# Altium PCB pcb-rev1-env.PcbDoc (part 2 of 2)
Units mm, origin at the board's own origin, x right, y up, seen from the top; angles counter-clockwise.
Board outline 100 x 50 mm, 2 copper layers (Top Layer, Bottom Layer); 97 components, 95 nets, 368 pads, 249 vias.
Unrouted connection lines stored in the file: 77.
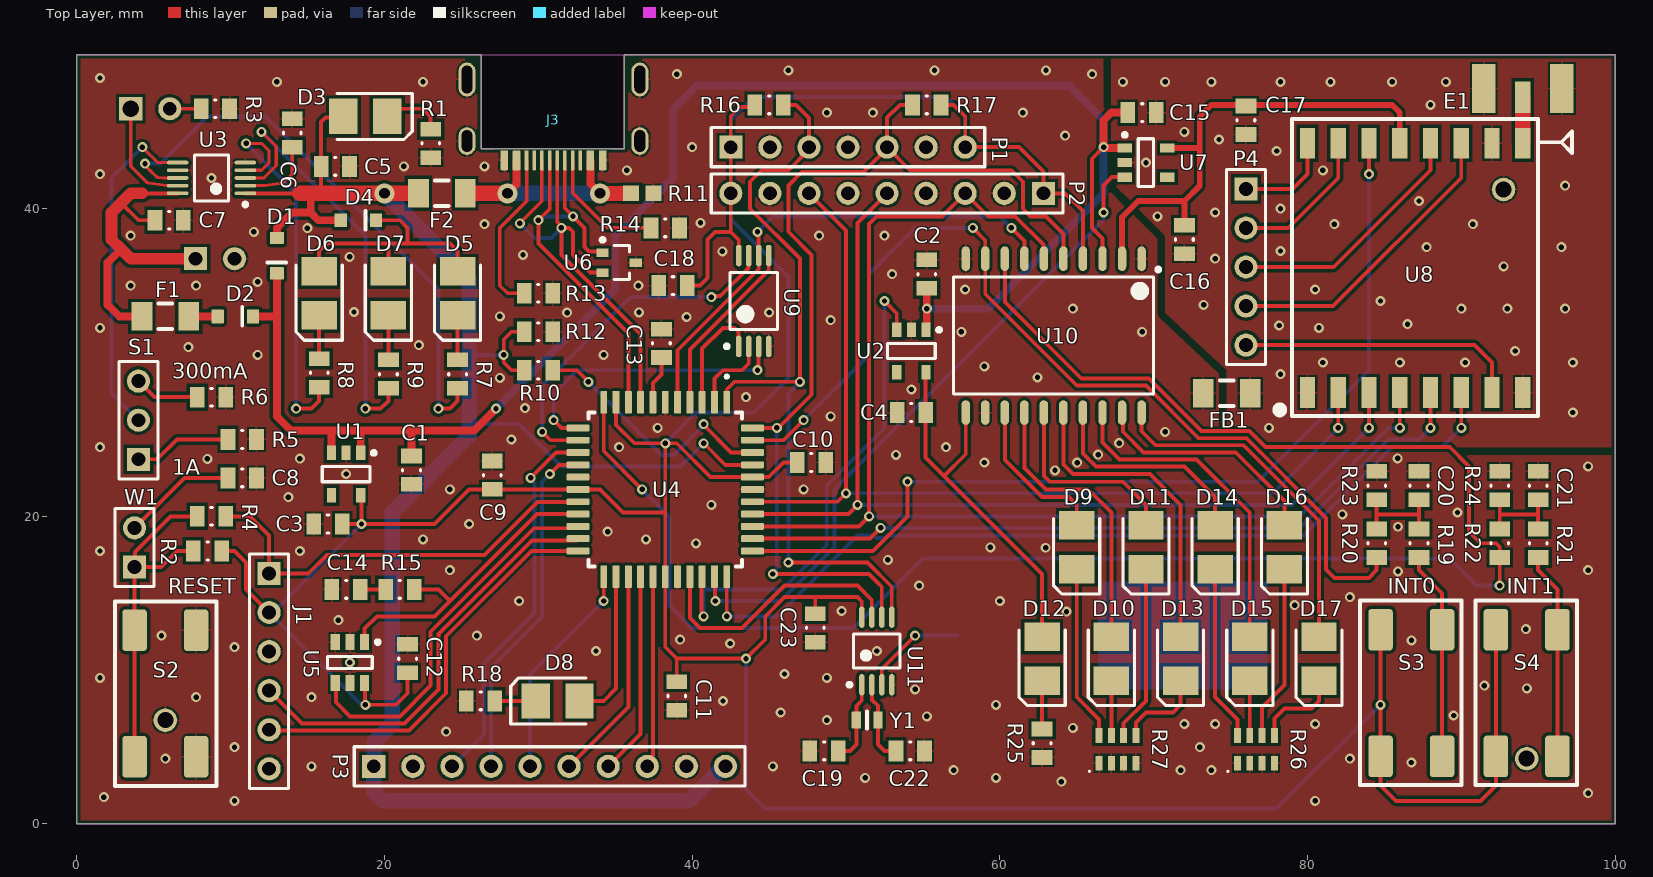
[diagram p0: Top Layer view]

## Via types
v1: diameter 0.65, hole 0.35, Top Layer to Bottom Layer, 246 vias
v2: diameter 1.3, hole 0.7, Top Layer to Bottom Layer, 3 vias

## Nets (pads, with @x,y where several pads share a name; then routed paths per layer and width w, separated by ;. In a path a pad name is that pad's centre, name@x,y a point inside that pad or via, vN(x,y) a via of type N, cw(c..) or ccw(c..) an arc to the next point about the centre after c; other vN are vias at no path point) (continued)
MEMDO: U4.4 U9.5 | length 11.7
  Top Layer w0.254: U4.4 39.85,30.85 44.975,35.975 U9.5
MEMHOLD: U4.13 U9.7 | length 22.9
  Top Layer w0.254: v1(30.25,25.5) 30.8,24.95 U4.13 ; v1(41.25,34.25) 41.326,34.326 41.826,34.326 43.658,36.158 43.658,36.933 U9.7
  Bottom Layer w0.254: v1(30.25,25.5) 30.25,28.5 36,34.25 v1(41.25,34.25)
MEMWP: U4.12 U9.3 | length 18.9
  Top Layer w0.254: v1(31,26.25) 31.5,25.75 U4.12 ; v1@44.301,29.551 44.301,31.026 U9.3
  Bottom Layer w0.254: v1(31,26.25) 31,28 32.5,29.5 v1(44.25,29.5)
MISO: P2.7 U4.38 U8.2 | length 62.9
  Top Layer w0.254: U4.38 49.45,20.95 v1(50,21.5) 50,38.59 P2.7 ; v1(82,25.75) U8.2
  Bottom Layer w0.254: v1(50,21.5) 77.75,21.5 v1(82,25.75)
MOSI: P2.5 U4.37 U8.3 | length 65.7
  Top Layer w0.254: U4.37 50.15,20.15 v1(50.75,20.75) 50.75,39.08 P2.5 ; v1(84,25.75) U8.3
  Bottom Layer w0.254: v1(50.75,20.75) 79,20.75 v1(84,25.75)
NetBT1_POS: BT1.POS U11.3 | length 6.9
  Top Layer w0.254: U11.3 52.325,10.075 v1(54.5,12.25)
  Bottom Layer w0.254: v1(54.5,12.25) BT1.POS
NetC6_2: C6.2 U3.2 | length 5
  Top Layer w0.203: U3.2 12.231,41.5 13.434,41.684 14,42.25 C6.2
NetC8_2: C8.2 W1.2 | length 7.1
  Top Layer w0.254: W1.2 7,22.5 C8.2@9.478,22.5
NetC14_1: C14.1 R15.1 | length 1.7
  Top Layer w0.254: C14.1 R15.1
NetC20_1: C20.1 R19.1 R20.1 R23.1 | length 6.6
  Top Layer w0.254: R20.1 84.5,20.125 ; R23.1 84.5,20.125 ; R19.1 87.25,20.125 ; C20.1 87.25,20.125 ; 84.5,20.125 87.25,20.125
NetC21_1: C21.1 R21.1 R22.2 R24.1 | length 6.3
  Top Layer w0.254: R22.2 92.5,20.125 ; R24.1 92.5,20.125 ; R21.1 95,20.125 ; C21.1 95,20.125 ; 92.5,20.125 95,20.125
NetD2_2: D2.2 F1.2 | length 1.9
  Top Layer w0.508: F1.2 D2.2
NetD3_2: D3.2 R1.1 | length 4.1
  Top Layer w0.254: D3.2 20.675,46.5 22.5,46.5 23,46 R1.1
NetD5_2: D5.2 R7.2 | length 2.9
  Top Layer w0.254: R7.2 D5.2
NetD6_2: D6.2 R8.2 | length 2.8
  Top Layer w0.254: R8.2 D6.2
NetD7_2: D7.2 R9.2 | length 2.9
  Top Layer w0.254: R9.2 D7.2
NetD8_2: D8.2 R18.2 | length 2.6
  Top Layer w0.254: R18.2 D8.2
NetD9_2: D9.2 R27.8 | length 11.4
  Top Layer w0.254: D9.2 65,8.25 66.45,6.8 R27.8
NetD10_2: D10.2 R27.7 | length 3.6
  Top Layer w0.254: R27.7 D10.2
NetD11_2: D11.2 R27.6 | length 11.4
  Top Layer w0.254: R27.6 68.05,6.55 69.5,8 D11.2
NetD12_2: D12.2 R25.2 | length 3.2
  Top Layer w0.254: R25.2 D12.2
NetD13_2: D13.2 R27.5 | length 5.8
  Top Layer w0.254: R27.5 68.85,6.6 69.5,7.25 71.25,7.25 71.75,7.75 D13.2
NetD14_2: D14.2 R26.8 | length 11.4
  Top Layer w0.254: D14.2 74,8.25 75.45,6.8 R26.8
NetD15_2: D15.2 R26.7 | length 3.6
  Top Layer w0.254: R26.7 D15.2
NetD16_2: D16.2 R26.6 | length 11.4
  Top Layer w0.254: R26.6 77.05,7.583 78.5,9.033 D16.2
NetD17_2: D17.2 R26.5 | length 5.8
  Top Layer w0.254: R26.5 77.85,6.85 78.5,7.5 80.25,7.5 80.75,8 D17.2
NetE1_ANT: E1.ANT U8.9 | length 3
  Top Layer w1: U8.9 E1.ANT
NetP4_1: P4.1 U8.16 | length 6.4
  Top Layer w0.254: P4.1 79.04,41.29 80,42.25 U8.16
NetP4_2: P4.2 U8.15 | length 9.6
  Top Layer w0.254: P4.2 78.75,38.75 82,42 U8.15
NetP4_3: P4.3 U8.12 | length 16.4
  Top Layer w0.254: P4.3 81.71,36.21 88,42.5 U8.12
NetP4_4: P4.4 U8.11 | length 19.7
  Top Layer w0.254: P4.4 81.67,33.67 90,42 U8.11
NetP4_5: P4.5 U8.7 | length 18.4
  Top Layer w0.254: P4.5 90.87,31.13 92,30 U8.7
NetR2_1: R2.1 R4.2 S2.3-4 W1.1 | length 22.8
  Top Layer w0.254: S2.3-4@3.75,4.375 3.75,12.6 W1.1 ; R2.1@7.825,17.75 R2.1 6.5,17.75 5.46,16.71 W1.1 ; R4.2 6.079,20 3.771,17.692 3.771,16.731 W1.1
NetR3_2: R3.2 RT1.2 | length 2
  Top Layer w0.254: RT1.2 R3.2
NetR5_1: R5.1 S1.1 | length 6.4
  Top Layer w0.254: S1.1 5.21,23.71 6.5,25 R5.1
NetR6_1: R6.1 S1.3 | length 4.3
  Top Layer w0.254: S1.3 5.04,27.75 R6.1
NetR10_1: R10.1 U4.42 | length 17
  Top Layer w0.254: R10.1 32.5,29.5 v1(33.25,28.75) ; v1(40.75,26) 40.75,25.93 42.53,24.15 U4.42
  Bottom Layer w0.254: v1(33.25,28.75) 38,24 38.82,24 40.75,25.93 v1(40.75,26)
NetR19_2: R19.2 S3.3-4 | length 13.5
  Top Layer w0.254: R19.2 87.25,16.5 88.75,15 88.75,12.625 S3.3-4@88.75,4.4
NetR21_2: R21.2 S4.3-4 | length 13.4
  Top Layer w0.254: R21.2 95,16.5 96.25,15.25 96.25,12.625 S4.3-4@96.25,4.4
PG: R7.1 U3.8 | length 37.6
  Top Layer w0.203: v1(4.43,42.93) 4.43,42.809 4.803,42.436 5.139,42.099 5.188,42.051 5.255,42.042 5.56,42 U3.8
  Top Layer w0.254: v1(23.5,27) 24.25,27 24.75,27.5 R7.1
  Bottom Layer w0.254: v1(4.43,42.93) 5.43,42.93 8.5,46 12.25,46 23.5,34.75 v1(23.5,27)
PGC: J1.5 U4.22 | length 27.1
  Top Layer w0.254: J1.5 12.544,6.086 21.586,6.086 24,8.5 24,12.207 29.543,17.75 U4.22
PGD: J1.4 U4.21 | length 28
  Top Layer w0.254: J1.4 14.627,6.543 21.293,6.543 23.5,8.75 23.5,12.353 29.574,18.427 32.457,18.427 U4.21
PROG1: S1.2 U3.6 | length 22
  Top Layer w0.203: v1(4.25,44) 5.25,43 U3.6
  Bottom Layer w0.254: S1.2 2.25,28 2.25,42 v1(4.25,44)
RB2: P3.5 U4.23 | length 14.3
  Top Layer w0.254: v1(34.25,14.5) U4.23
  Bottom Layer w0.254: P3.5 29.46,9.71 v1(34.25,14.5)
RB14: P3.3 U4.14 | length 24.8
  Top Layer w0.254: v1(29.5,22.5) 31.15,24.15 U4.14
  Bottom Layer w0.254: P3.3 26.463,5.833 26.463,10.359 26.5,10.397 26.5,10.5 29.75,13.75 29.75,22.153 29.5,22.403 v1(29.5,22.5)
RB15: P3.4 U4.15 | length 22.7
  Top Layer w0.254: v1(30.75,22.75) 31.35,23.35 U4.15
  Bottom Layer w0.254: P3.4 26.92,10.17 30.25,13.5 30.25,22.25 v1(30.75,22.75)
RC0: P3.6 U4.25 | length 13.9
  Top Layer w0.254: P3.6 35.85,7.6 U4.25
RC1: P3.7 U4.26 | length 13.2
  Top Layer w0.254: P3.7 36.65,5.86 U4.26
RC2: P3.8 U4.27 | length 12.5
  Top Layer w0.254: P3.8 37.08,4.087 37.45,4.457 U4.27
RFCS: U4.35 U8.5 | length 49.4
  Top Layer w0.254: U4.35 51.55,18.55 v1(52.25,19.25) ; v1(88,25.75) U8.5
  Bottom Layer w0.254: v1(52.25,19.25) 79.5,19.25 85.25,25 87.25,25 v1(88,25.75)
RFEN: U4.32 U7.3 | length 43.2
  Top Layer w0.254: U4.32 41.475,16.055 41.475,14.525 v1(41.5,14.5) ; v1(66.75,39.75) 66.75,41.5 67.3,42.05 U7.3
  Bottom Layer w0.254: v1(41.5,14.5) 45.75,14.5 49.25,18 49.25,21.774 66.743,39.267 66.743,39.743 v1(66.75,39.75)
RFINT: U4.34 U8.14 | length 61
  Top Layer w0.254: U4.34 51.75,17.75 54,20 v1(54,22.25) ; v1(84,42.25) U8.14
  Bottom Layer w0.254: v1(54,22.25) 76.75,22.25 84,29.5 v1(84,42.25)
RFRST: U4.33 U8.6 | length 57.8
  Top Layer w0.254: v1(42.25,13.5) U4.33 ; v1(90,25.75) U8.6
  Bottom Layer w0.254: v1(42.25,13.5) 45.5,13.5 50.75,18.75 51.823,18.75 51.979,18.595 52.521,18.595 52.677,18.75 79.75,18.75 85.5,24.5 88.75,24.5 v1(90,25.75)
RTCC: D8.1 U4.24 | length 10
  Top Layer w0.254: D8.1 34.25,8 35.05,8.8 U4.24
RTCMF: U4.30 U11.7 | length 17.4
  Top Layer w0.254: U4.30 39.85,13.4 40.5,12.75 43.25,12.75 46,15.5 50.75,15.5 51.675,14.575 U11.7
SCL: P1.5 R17.2 U4.44 U10.5 U11.6 | length 65.8
  Top Layer w0.254: U4.44 45.595,25.75 47.75,27.905 47.75,37 46.25,38.5 46.25,41.5 47.125,42.375 51.125,42.375 52.67,43.92 P1.5 ; v1(45.25,16.25) 51.5,16.25 52.176,15.574 52.325,15.425 U11.6 ; R17.2 53.5,46.75 52.67,45.92 P1.5 ; U10.5 64.135,38.365 63,39.5 62,39.5 61.5,40 61.5,41.75 60.75,42.5 54.17,42.5 P1.5
  Bottom Layer w0.254: v1(45.25,16.25) 45.25,16.347 45.5,16.597 v1(45.5,25.75)
SCLK: P2.3 U4.36 U8.4 U10.6 | length 80.5
  Top Layer w0.254: U4.36 50.85,19.35 v1(51.5,20) 51.5,39 52,39.5 56.25,39.5 P2.3 59.25,39.5 61,39.5 62.835,37.665 62.835,36.78 U10.6 ; v1(86,25.75) U8.4
  Bottom Layer w0.254: v1(51.5,20) 79.5,20 85.25,25.75 v1(86,25.75)
SDA: P1.3 R16.2 U4.1 U11.5 | length 50.3
  Top Layer w0.254: U4.1 42.25,28.25 42.75,28.75 v1(47,28.75) 47,36.75 43.75,40 43.75,41.75 44.5,42.5 46.25,42.5 47.59,43.84 P1.3 47.59,45.91 46.75,46.75 R16.2 ; v1(46.25,17) 51.397,17 52.975,15.422 U11.5
  Bottom Layer w0.254: v1(46.25,17) 46.25,28 v1(47,28.75)
SIG: C15.1 C16.1 C17.1 E1.GND FB1.2 pad.2 U7.2 U8.1 U8.8 U8.10
  other v1: 77.5,25.75 97.25,26.75 78.25,29.25 81,30 86,30 90.25,30 97.25,30 93.5,30.75 80.75,32.25 78.163,32.405 86.5,32.5 90,33.5 93,33.5 96.75,33.5 73.25,33.75 84.75,34 80.5,34.75 92.75,36.25 74,36.75 78.25,37.25 87.75,37.5 96.5,37.5 81.75,39 90.75,39 70.25,39.5 74,39.75 78.25,40 87.25,40.5 96.75,41.5 81,42.5 69.5,43 78,43.75 74.25,44.5 72,45 88,46.75 68,48.25 70.75,48.25 73.75,48.25 78.25,48.25 81.5,48.25 85.5,48.25 89,48.25
STAT1: R9.1 U3.3 | length 28.3
  Top Layer w0.203: U3.3 12.147,42 12.957,42.811 12.957,44.043 v1(12,45)
  Top Layer w0.254: v1(18.75,27) 19.75,27 20.25,27.5 R9.1
  Bottom Layer w0.254: v1(12,45) 18.75,38.25 v1(18.75,27)
STAT2: R8.1 U3.4 | length 25.4
  Top Layer w0.203: U3.4 12,42.5 12.5,43 12.5,43.75 12,44.25 v1(11,44.25)
  Top Layer w0.254: v1(14.25,27) 15.25,27 15.75,27.5 R8.1
  Bottom Layer w0.254: v1(11,44.25) 14.25,41 v1(14.25,27)
THERM: RT1.1 U3.9 | length 7.2
  Top Layer w0.203: RT1.1 3.5,42.75 4.499,41.751 4.545,41.711 4.581,41.696 4.665,41.661 5.842,41.5 U3.9
VBAT: C7.2 F1.1 J2.1 U3.10 | length 21.9
  Top Layer w0.254: 2.125,39 2.25,38.875 ; 2.875,40.375 4,39.25 C7.2 ; 4.25,41 U3.10
  Top Layer w0.508: 2.875,37.375 2,36.5 2,33.75 2.75,33 F1.1
  Top Layer w0.762: 4.25,41 3.5,41 2.875,40.375 2.25,39.75 2.25,38.875 2.25,38 2.875,37.375 3.5,36.75 J2.1
VBUS: C5.2 D1.2 D3.1 D4.2 F2.1 P3.1 P3.10 R10.2 R12.1 U3.1 U4.41 | length 119.5
  Top Layer w0.254: U3.1 14.5,41 ; 15.2,40.95 15.25,41 ; 15.875,41 C5.2 15.875,45.625 16.168,45.918 17.243,45.918 D3.1 ; R10.2 28.25,29.5 27.75,30 v1(27.75,30.5) 27.75,31.5 28.25,32 R12.1 ; v1(40.75,24.75) 42.15,23.35 U4.41
  Top Layer w0.508: D1.2 13,38.75 14,39.75 15.2,39.75 ; 15.2,40.95 15.2,39.75 ; D4.2 15.7,39.25 15.2,39.75
  Top Layer w1.016: 14.5,41 15.25,41 15.875,41 v2(20,41) F2.1
  Bottom Layer w0.254: 25.5,26 28.75,26 31.5,23.25 39.25,23.25 v1(40.75,24.75) ; 25.5,30.5 v1(27.75,30.5)
  Bottom Layer w1.016: v2(20,41) 25.5,35.5 25.5,30.5 25.5,26 25.5,25.25 20.5,20.25 20.5,6.5 19.337,5.337 19.337,3.992 19.3,3.955 P3.1 19.3,2.095 19.895,1.5 39.779,1.5 42.029,3.75 P3.10
VBUSIN: F2.2 J3.A4-B9 J3.B4-A9 R11.1 | length 15.3
  Top Layer w0.508: v2(28,41) 28.58,41.58 J3.B4-A9 ; J3.A4-B9 33.38,41.62 v2(34,41)
  Top Layer w0.965: v2(34,41) R11.1@35.75,41
  Top Layer w1.016: F2.2 v2(28,41)
  Bottom Layer w1.016: v2(28,41) v2(34,41)
VCAP: C13.2 U4.7 | length 3.1
  Top Layer w0.254: U4.7 37.45,28.666 38,29.216 C13.2
VDBG: C4.2 D12.1 U2.5 U10.11 | length 25.1
  Top Layer w0.254: U2.5 55.175,29.35 C4.2 55.175,23.825 56.375,22.625 ; U10.11 57.785,24.035 56.375,22.625 ; D12.1 62.75,16.25 56.375,22.625
VIN: C1.2 C2.2 C15.2 D1.1 D2.1 U1.1 U1.3 U2.1 U7.1 U10.3 | length 118.9
  Top Layer w0.254: 21.75,25.536 21.786,25.571 ; U10.3 66.675,38.075 66,38.75 66,43.25 v1(66.75,44)
  Top Layer w0.508: D2.1 13,33 ; D1.1 13,33 ; U1.3 16.55,25.521 16.5,25.571 ; U1.1 18.45,25.521 ; C1.2 21.75,25.536 ; v1(27.25,27) 25.821,25.571 21.786,25.571 18.45,25.571 16.5,25.571 ; U2.1@55.25,32.442 v1(55.25,33.5) C2.2 ; v1(66.75,44) 66.788,44 66.838,43.95 U7.1 ; v1@66.75,44.038 66.75,45.75 67.25,46.25 C15.2 ; 13,33 13,26.5 13.929,25.571 16.5,25.571
  Bottom Layer w0.508: v1(27.25,27) 35,34.75 35,38.25 38.75,42 38.75,46.452 40.298,48 64.5,48 66.75,45.75 v1(66.75,44) 66.75,41 59.25,33.5 v1(55.25,33.5)
VREF: R15.2 U4.19 U5.1 | length 20.5
  Top Layer w0.254: U5.1 18.7,12.7 19.5,13.5 23.25,13.5 24.25,14.5 ; R15.2 23.5,15.25 24.25,14.5 ; U4.19 29.9,20.15 24.25,14.5
VREFEN: U4.20 U5.4 | length 24.6
  Top Layer w0.254: U5.4 16.832,9.143 16.832,7.918 17.75,7 21,7 23,9 23,12.5 29.727,19.227 32.457,19.227 U4.20
VREG: C3.2 C9.1 C10.1 C11.2 C12.1 C18.2 C23.2 J1.2 P1.1 P1.7 P2.1 P2.9 R2.2 R16.1 R17.1 S3.1-2 S4.1-2 U1.5 U4.10 U4.17 U4.28 U4.40 U5.6 U9.8 U10.4 U11.8 | length 259.6
  Top Layer w0.254: R2.2@9.675,17.75 10.25,17.75 11,17 11,15.25 J1.2 ; C3.2 v1(18.5,19.5) ; U1.5 18.5,21.325 v1(18.5,19.5) ; U5.6 18.725,9.15 18.725,7.775 v1(18.75,7.75) 20.75,7.75 21.5,8.5 C12.1 ; U4.10 35.05,25.95 36.25,24.75 v1(38.25,24.75) ; C11.2 39,10.75 ; C18.2 40.5,35 41,35.5 41,38 41.49,38.49 42.51,38.49 ; U9.8 43.025,37.975 42.51,38.49 ; R16.1 43.943,46.618 43.118,46.618 42.51,46.01 P1.1 P2.9 42.51,38.49 ; C10.1 45.928,23.5 44.978,22.55 U4.40 41.2,22.55 39,24.75 v1(38.25,24.75) ; C23.2 48,14.75 ; U11.8 51.025,14.475 50.75,14.75 48,14.75 ; R17.1 57,46.75 57.75,46 P1.7 61.25,44 62.83,42.42 P2.1 64.25,41 65.405,39.845 U10.4 ; S3.1-2@84.75,12.625 84.75,2.5 85.75,1.5 91.25,1.5 92.25,2.5 92.25,4.4 S4.1-2@92.25,12.625 ; v1(18.5,19.5) 23.25,19.5 25.5,21.75 C9.1 U4.17 34,21.75 35.5,20.25 38.25,20.25 ; 38.25,20.25 U4.28 38.25,11.5 39,10.75 ; 38.25,20.25 38.25,21.75 v1(38.25,24.75) ; 39,10.75 v1(43.5,10.75) 44.75,12 44.75,13.5 46,14.75 48,14.75
  Bottom Layer w0.254: v1@18.424,19.424 12.75,13.75 J1.2 18.424,7.826 18.674,7.826 v1(18.75,7.75) ; v1(38.25,24.75) 40.25,26.75 44,26.75 46.25,29 46.25,35.573 43.979,37.845 42.51,39.313 P2.9 ; P1.1 42.51,45.76 44,47.25 56.5,47.25 57.75,46 P1.7 ; v1(43.5,10.75) 43.5,2.25 44.75,1 78,1 v1(84.75,7.75)
VRF: C16.2 C17.2 U7.5 U8.13 U10.2 | length 32.3
  Top Layer w0.381: U10.2 67.945,39.445 69,40.5 72,40.5 ; U7.5 73,43.95 ; C16.2 72,40.5 ; U8.13 86,46.25 85.5,46.75 73.75,46.75 73,46 73,43.95 ; 72,40.5 73,41.5 73,43.95
X1: C19.2 U11.1 Y1.2 | length 5.4
  Top Layer w0.254: C19.2 50.25,4.75 50.673,5.173 Y1.2 50.673,7.673 51.025,8.025 U11.1
X2: C22.2 U11.2 Y1.1 | length 5.4
  Top Layer w0.254: U11.2 51.693,9.032 51.693,8.07 52.073,7.69 Y1.1 52.073,5.177 52.5,4.75 C22.2
pads on no net: J1.6 J3.A8 J3.B8 U1.4 U2.4 U7.4
copper on no net:
  other v1: 17.75,10.5

## Polygon pours and split planes (outlines as drawn)
GND on Top Layer "GND-TOP" (solid, remove dead copper, pour order 6): 100,0 100,24.5 74.75,24.5 74.75,29.5 70.75,33.25 70.75,38.25 67.25,41.75 67.25,50 0,50 0,0
SIG on Top Layer "SIG-TOP" (solid, remove dead copper, pour order 2): 100,50 100,24.5 92,24.5 74.75,24.5 74.75,29.5 70.75,33.25 70.75,38.25 67.25,41.75 67.25,50
GND on Bottom Layer "GND-BOT" (solid, remove dead copper, pour order 7): 100,0 100,24.5 74.75,24.5 74.75,29.5 70.75,33.25 70.75,38.25 67.25,41.75 67.25,50 0,50 0,0
SIG on Bottom Layer "SIG-BOT" (solid, remove dead copper, pour order 0): 100,50 100,24.5 92,24.5 74.75,24.5 74.75,29.5 70.75,33.25 70.75,38.25 67.25,41.75 67.25,50

## Keep-outs
Keep-Out Layer:
  lines w0.025: 26.3,50 26.3,43.9 27.1,43.9 ; 34.8,43.9 35.6,43.9 35.6,50 ; 0,0 100,0 100,50 0,50 0,0

## Silkscreen, mask and mechanical layers (free items; w line width, h text height)
Top Overlay:
  text "300mA" at 6.203,28.953 h1
  text "1A" at 6.203,22.703 h1
  text "RESET" at 5.953,14.953 h1
  text "INT0" at 85.203,14.953 h1
  text "INT1" at 92.953,14.953 h1
Bottom Overlay:
  text "LIPO" at 8.297,40.203 h1
  text "CR2032" at 77.047,22.953 h1
notes:
  lines w0.025: 2,2 2,48 98,48 98,2 2,2
Board Outline:
  the board outline again, w0.025